# EAGLE board LiPoLoader_diet (EAGLE 5.09), part 1 of 2
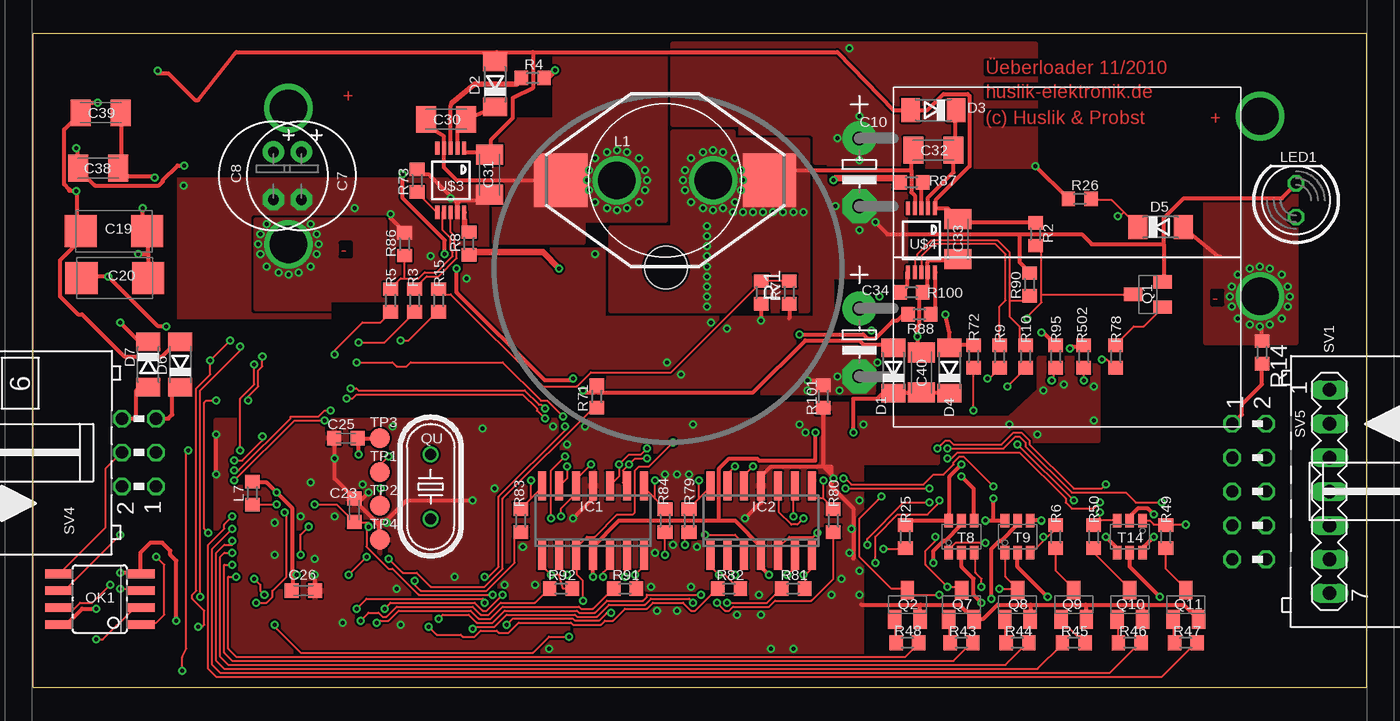
[diagram p0: board, top side]
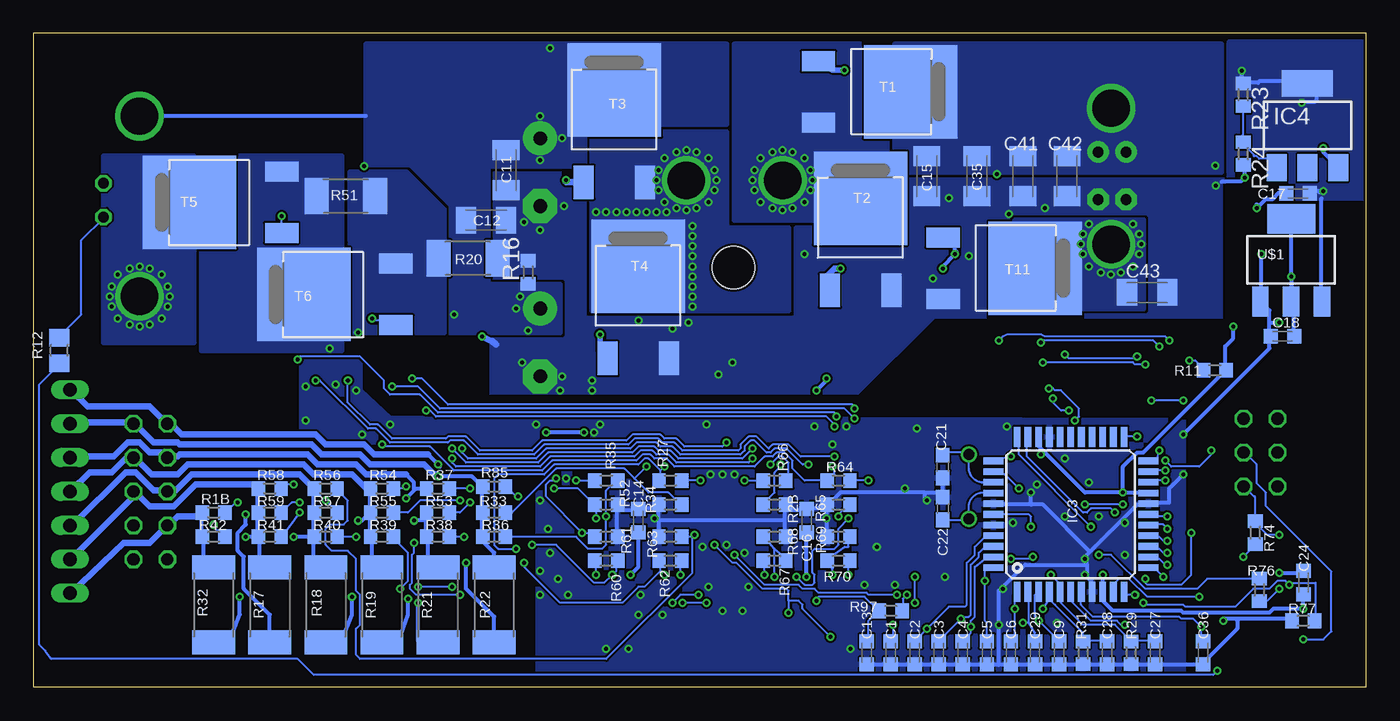
[diagram p1: board, bottom side, seen from below]

Size 99.8 x 49 mm. Coordinates in mm from the lower left corner, seen from the top.
Copper layers (1*16): Top 0.035mm / dielectric 1.5mm / Bottom 0.035mm
Design rules "Fischer-LP *": minimum track width 0.15mm, minimum drill 0.3mm, track to track 0.15mm, track to pad 0.15mm, pad to pad 0.15mm, via to via 0.15mm, smd to smd 0mil, copper to edge 0.2mm, drill to drill 0.3mm, minimum pad ring 0.2mm, minimum via ring 0.15mm, stop-mask expansion 0.1mm, vias tented up to drill 0.5mm, thermal gap 0.15mm
Net classes: 1 Hi-Power: width 0.3 mm; 2 Lo-Power: width 0.3 mm; 3 Iso-bus: clearance 0.6 mm to class 0, clearance 0.6 mm to class 1, clearance 0.6 mm to class 2
Holes 3.2 mm at 47.36,31.46
tRestrict: 16 lines
bRestrict: 9 lines
vRestrict: area 22.5,27.6 to 30.3,28.9

## Footprints (pad centres in the part's own frame; a part is rotated, then mirrored left to right if it is on the bottom)
SOLPAD3MM = drill 2.8 round: P$1 0,0
C0603K = smd 1.05 x 1.08: 1 -0.875,0; 2 0.875,0
E3,5-8 = drill 0.813 pad 1.6 round: + -1.778,0 | drill 0.813 pad 1.6 octagon: - 1.778,0
E5-13-L = drill 1.016 pad 2.54 round: + -2.54,0 | drill 1.016 pad 2.54 octagon: - 2.54,0
C1206K = smd 1.5 x 2: 1 -1.5,0; 2 1.5,0
SMC_C = smd 2.4 x 2.4: + -2.5,0; - 2.5,0
C0603 = smd 1.1 x 1: 1 -0.85,0; 2 0.85,0
SOD80C = smd 1.4 x 1.8: A 1.7,0; C -1.7,0
SO14 = smd 0.6 x 2.2: 1 -3.81,-2.6; 2 -2.54,-2.6; 3 -1.27,-2.6; 4 0,-2.6; 5 1.27,-2.6; 6 2.54,-2.6; 7 3.81,-2.6; 8 3.81,2.6; 9 2.54,2.6; 10 1.27,2.6; 11 0,2.6; 12 -1.27,2.6; 13 -2.54,2.6; 14 -3.81,2.6
TQFP44 = smd 1.5 x 0.5: 1 -5.8,4; 2 -5.8,3.2; 3 -5.8,2.4; 4 -5.8,1.6; 5 -5.8,0.8; 6 -5.8,0; 7 -5.8,-0.8; 8 -5.8,-1.6; 9 -5.8,-2.4; 10 -5.8,-3.2; 11 -5.8,-4; 23 5.8,-4; 24 5.8,-3.2; 25 5.8,-2.4; 26 5.8,-1.6; 27 5.8,-0.8; 28 5.8,0; 29 5.8,0.8; 30 5.8,1.6; 31 5.8,2.4; 32 5.8,3.2; 33 5.8,4 | smd 0.5 x 1.5: 12 -4,-5.8; 13 -3.2,-5.8; 14 -2.4,-5.8; 15 -1.6,-5.8; 16 -0.8,-5.8; 17 0,-5.8; 18 0.8,-5.8; 19 1.6,-5.8; 20 2.4,-5.8; 21 3.2,-5.8; 22 4,-5.8; 34 4,5.8; 35 3.2,5.8; 36 2.4,5.8; 37 1.6,5.8; 38 0.8,5.8; 39 0,5.8; 40 -0.8,5.8; 41 -1.6,5.8; 42 -2.4,5.8; 43 -3.2,5.8; 44 -4,5.8
SOT223 = smd 1.5 x 2: 1 -2.3,-3.15; 2 0,-3.15; 3 2.3,-3.15 | smd 3.8 x 2: 4 0,3.15
D333 = smd 4 x 4: 1 -7.82,0; 2 7.82,0
R0603 = smd 1 x 1.1: 1 -0.85,0; 2 0.85,0
LED5MM = drill 0.813 octagon: A -1.27,0; K 1.27,0
SOIC08 = smd 0.66 x 2.032: 1 -1.905,-3.073; 2 -0.635,-3.073; 3 0.635,-3.073; 4 1.905,-3.073; 5 1.905,3.073; 6 0.635,3.073; 7 -0.635,3.073; 8 -1.905,3.073
SOT23-BEC = smd 1 x 1.4: B -0.95,-1.1; C 0,1.1; E 0.95,-1.1
HC49U-V = drill 0.813 round: 1 -2.413,0; 2 2.413,0
R0805 = smd 1.3 x 1.5: 1 -0.95,0; 2 0.95,0
R2512 = smd 1.8 x 3.2: 1 -2.8,0; 2 2.8,0
R2010 = smd 1.8 x 2.7: 1 -2.2,0; 2 2.2,0
MA07-1 = drill 1.016 long: 1 -7.62,0; 2 -5.08,0; 3 -2.54,0; 4 0,0; 5 2.54,0; 6 5.08,0; 7 7.62,0
ML6L = drill 0.914 octagon: 1 -2.54,-1.27; 2 -2.54,1.27; 3 0,-1.27; 4 0,1.27; 5 2.54,-1.27; 6 2.54,1.27
ML10L = drill 0.914 octagon: 1 -5.08,-1.27; 2 -5.08,1.27; 3 -2.54,-1.27; 4 -2.54,1.27; 5 0,-1.27; 6 0,1.27; 7 2.54,-1.27; 8 2.54,1.27; 9 5.08,-1.27; 10 5.08,1.27
DPAK = smd 1.5 x 2.5: 1 -2.3,-6.9; 3 2.3,-6.9 | smd 7 x 7: 4 0,0
SUPERSOT-6 = smd 0.65 x 1: P$1 -0.95,-1.2; P$2 0,-1.2; P$3 0.95,-1.2; P$4 0.95,1.2; P$5 0,1.2; P$6 -0.95,1.2
TP15R = smd 1.5 x 1.5: TP 0,0
SOT223' = smd 1.219 x 2.235: LEFT -2.311,-3.099; MID 0,-3.099; RIGHT 2.311,-3.099 | smd 3.6 x 2.2: TAP 0,3.099
MSOP10W = smd 0.3 x 1: 1 -1,-2.4; 2 -0.5,-2.4; 3 0,-2.4; 4 0.5,-2.4; 5 1,-2.4; 6 1,2.4; 7 0.5,2.4; 8 0,2.4; 9 -0.5,2.4; 10 -1,2.4

## Placement (x,y rotation side)
BATT+  SOLPAD3MM  [SOLPAD3MM]  91.85,42.8 0 top
BATT-  SOLPAD3MM  [SOLPAD3MM]  91.85,29.3 0 top
C1  100n  [C0603K]  35.6,2.6 90 bottom
C2  100n  [C0603K]  33.8,2.6 90 bottom
C3  100n  [C0603K]  32,2.6 90 bottom
C4  100n  [C0603K]  30.2,2.6 90 bottom
C5  100n  [C0603K]  28.4,2.6 90 bottom
C6  100n  [C0603K]  26.6,2.6 90 bottom
C7  330µF / 25V  [E3,5-8]  20.06,38.34 270 top
C8  330µF / 25V  [E3,5-8]  17.97,38.34 270 top
C9  100n  [C0603K]  23,2.6 90 bottom
C10  1000µF/35V  [E5-13-L]  61.85,38.6 270 top
C11  1u  [C1206K]  64.4,38.75 90 bottom
C12  10µF  [C1206K]  65.9,35 0 bottom
C13  100n  [C0603K]  37.4,2.6 90 bottom
C14  100n  [C0603K]  54.5,12.5 270 bottom
C15  1u  [C1206K]  32.9,38.3 90 bottom
C16  100n  [C0603K]  41.9,12.5 270 bottom
C17  100n  [C0603K]  5.1,37 0 bottom
C18  100n  [C0603K]  6.25,26.3 0 bottom
C19  100u Tan  [SMC_C]  6.03,34.18 0 top
C20  100u Tan  [SMC_C]  6.1,30.67 0 top
C21  10p  [C0603]  31.7,16.55 90 bottom
C22  10p  [C0603]  31.7,13.4 270 bottom
C23  100n  [C0603K]  24.03,13.29 270 top
C24  100n  [C0603K]  4.68,7.86 270 bottom
C25  100n  [C0603K]  23.39,18.68 0 top
C26  100n  [C0603K]  20.22,7.26 180 top
C27  100n  [C0603K]  15.8,2.6 90 bottom
C28  100n  [C0603K]  19.4,2.6 90 bottom
C29  100n  [C0603K]  24.8,2.6 90 bottom
C30  1u  [C1206K]  30.91,42.56 0 top
C31  1u  [C1206K]  34.16,38.41 90 top
C32  1u  [C1206K]  67.4,40.25 0 top
C33  1u  [C1206K]  69.23,33.58 90 top
C34  1000µF/35V  [E5-13-L]  61.85,25.85 270 top
C35  10µF  [C1206K]  29.15,38.3 270 bottom
C36  100n  [C0603K]  12.2,2.6 90 bottom
C38  1u  [C1206K]  4.85,38.9 180 top
C39  1u  [C1206K]  5.05,43.05 180 top
C40  1u  [C1206K]  66.5,23.6 270 top
C41  10µF  [C1206K]  25.7,38.3 270 bottom
C42  10µF  [C1206K]  22.4,38.3 270 bottom
C43  10µF  [C1206K]  16.4,29.6 0 bottom
COIL1  SOLPAD3MM  [SOLPAD3MM]  43.7,38 0 top
COIL2  SOLPAD3MM  [SOLPAD3MM]  50.9,38 0 top
D1  LL43-GS08  [SOD80C]  64.4,23.75 90 top
D2  LL43-GS08  [SOD80C]  34.57,45.18 90 top
D3  LL43-GS08  [SOD80C]  67.4,43.25 180 top
D4  LL43-GS08  [SOD80C]  68.6,23.75 90 top
D5  15V BZT55C15  [SOD80C]  84.41,34.48 0 top
D6  LL43-GS08  [SOD80C]  11,24.2 90 top
D7  LL43-GS08  [SOD80C]  8.6,24.2 270 top
IC1  LM224D  [SO14]  41.9,12.5 0 top
IC2  LM224D  [SO14]  54.5,12.5 0 top
IC3  AVR_XMEGA_A4_44A  [TQFP44]  22.12,12.97 90 bottom
IC4  LM317MSTT3  [SOT223]  4.4,42.1 0 bottom
L1  COILCRAFT_D333  [D333]  47.3,38 0 top
L7  27nH  [R0603]  16.39,14.56 90 top
LED1  [LED5MM]  94.55,36.5 90 top
OK1  ILD217  [SOIC08]  4.98,6.62 90 top
Q1  BC817-25SMD  [SOT23-BEC]  83.45,29.45 90 top
Q2  BC817-25SMD  [SOT23-BEC]  65.45,6.2 0 top
Q7  BC817-25SMD  [SOT23-BEC]  69.5,6.2 0 top
Q8  BC817-25SMD  [SOT23-BEC]  73.7,6.2 0 top
Q9  BC817-25SMD  [SOT23-BEC]  77.9,6.2 0 top
Q10  BC817-25SMD  [SOT23-BEC]  82.1,6.2 0 top
Q11  BC817-25SMD  [SOT23-BEC]  86.3,6.2 0 top
QU  16MHz  [HC49U-V]  29.75,15.05 90 top
R1  2k2  [R0603]  56.6,29.6 90 top
R1B  43k - 0.1%  [R0603]  86.3,13.1 0 bottom
R2  10k  [R0603]  75.05,33.95 90 top
R2B  20k - 0.1%  [R0603]  44.3,13.7 180 bottom
R3  0R  [R0603]  28.55,29 90 top
R4  10  [R0603]  37.39,45.66 180 top
R5  0R  [R0603]  26.75,29 90 top
R6  10k  [R0603]  76.55,11.3 90 top
R7  NB12K00103JBB  [R0603]  54.5,29.6 90 top
R8  10  [R0603]  32.62,33.27 90 top
R9  0R  [R0603]  72.35,24.8 270 top
R10  0R  [R0603]  74.3,24.8 270 top
R11  2k2  [R0603]  11.33,23.77 0 bottom
R12  330  [R0805]  97.85,25.25 90 bottom
R14  2k2  [R0603]  92,25.1 270 top
R15  0R  [R0603]  30.35,29 270 top
R16  10k  [R0603]  62.75,31.1 90 bottom
R17  10  [R2512]  82.1,6.2 270 bottom
R18  10  [R2512]  77.9,6.2 270 bottom
R19  10  [R2512]  73.7,6.2 270 bottom
R20  0.005R  [R2010]  67.25,32.15 180 bottom
R21  10  [R2512]  69.5,6.2 270 bottom
R22  10  [R2512]  65.3,6.2 270 bottom
R23  470  [R0603]  9.2,44.4 270 bottom
R24  3300  [R0603]  9.2,40 270 bottom
R25  43k - 0.1%  [R0603]  65.3,11.3 270 top
R26  100k  [R0603]  78.36,36.6 0 top
R27  20k - 0.1%  [R0603]  52.1,15.5 180 bottom
R28  33k - 0.1%  [R0603]  1.17,52.98 0 top  (outside the outline)
R29  10k - 0.1%  [R0603]  17.6,2.6 270 bottom
R30  43k - 0.1%  [R0603]  1.17,56.15 180 top  (outside the outline)
R31  10k - 0.1%  [R0603]  21.2,2.6 270 bottom
R32  10  [R2512]  86.3,6.2 270 bottom
R33  43k - 0.1%  [R0603]  65.3,13.1 0 bottom
R34  20k - 0.1%  [R0603]  52.1,13.7 0 bottom
R35  20k - 0.1%  [R0603]  56.9,15.5 0 bottom
R36  43k - 0.1%  [R0603]  65.3,11.3 0 bottom
R37  43k - 0.1%  [R0603]  69.5,14.9 0 bottom
R38  10k  [R0603]  69.5,11.3 180 bottom
R39  10k  [R0603]  73.7,11.3 180 bottom
R40  10k  [R0603]  77.9,11.3 180 bottom
R41  10k  [R0603]  82.1,11.3 180 bottom
R42  10k  [R0603]  86.3,11.3 180 bottom
R43  4k7  [R0603]  69.5,3.35 180 top
R44  4k7  [R0603]  73.7,3.35 180 top
R45  4k7  [R0603]  77.9,3.35 0 top
R46  4k7  [R0603]  82.1,3.35 180 top
R47  4k7  [R0603]  86.3,3.35 180 top
R48  4k7  [R0603]  65.45,3.35 180 top
R49  10k  [R0603]  84.8,11.3 90 top
R50  10k  [R0603]  79.4,11.3 90 top
R51  0.1R  [R2010]  76.4,36.8 180 bottom
R52  20k - 0.1%  [R0603]  56.9,13.7 180 bottom
R53  43k - 0.1%  [R0603]  69.5,13.1 0 bottom
R54  43k - 0.1%  [R0603]  73.7,14.9 0 bottom
R55  43k - 0.1%  [R0603]  73.7,13.1 0 bottom
R56  43k - 0.1%  [R0603]  77.9,14.9 0 bottom
R57  43k - 0.1%  [R0603]  77.9,13.1 0 bottom
R58  43k - 0.1%  [R0603]  82.1,14.9 0 bottom
R59  43k - 0.1%  [R0603]  82.1,13.1 0 bottom
R60  20k - 0.1%  [R0603]  56.9,9.5 0 bottom
R61  20k - 0.1%  [R0603]  56.9,11.3 180 bottom
R62  20k - 0.1%  [R0603]  52.1,9.5 180 bottom
R63  20k - 0.1%  [R0603]  52.1,11.3 0 bottom
R64  20k - 0.1%  [R0603]  39.5,15.5 180 bottom
R65  20k - 0.1%  [R0603]  39.5,13.7 0 bottom
R66  20k - 0.1%  [R0603]  44.3,15.5 0 bottom
R67  10k - 0.1%  [R0603]  44.3,9.5 0 bottom
R68  2k - 0.1%  [R0603]  44.3,11.3 0 bottom
R69  2k - 0.1%  [R0603]  39.5,11.3 180 bottom
R70  36k - 0.1%  [R0603]  39.5,9.5 180 bottom
R71  120k - 0.1%  [R0603]  42.2,21.8 270 top
R72  120k - 0.1%  [R0603]  70.4,24.8 270 top
R73  10k  [R0603]  28.74,37.97 90 top
R74  820  [R0603]  8.3,11.6 270 bottom
R76  820  [R0603]  8,7.31 90 bottom
R77  10k  [R0603]  4.7,5 180 bottom
R78  4k7  [R0603]  81.05,24.8 90 top
R79  10k  [R0603]  49.1,12.5 90 top
R80  10k  [R0603]  59.9,12.5 90 top
R81  10k  [R0603]  56.9,7.4 0 top
R82  10k  [R0603]  52.1,7.4 0 top
R83  10k  [R0603]  36.5,12.5 90 top
R84  10k  [R0603]  47.3,12.5 90 top
R85  10k  [R0603]  65.3,15.05 180 bottom
R86  10k  [R0603]  27.8,33.2 90 top
R87  10  [R0603]  65.75,37.85 0 top
R88  10  [R0603]  66.35,27.95 0 top
R90  10k  [R0603]  74.6,30.2 90 top
R91  10k  [R0603]  44.3,7.4 0 top
R92  10k  [R0603]  39.5,7.4 0 top
R93  18k - 0.1%  [R0603]  1.39,58.53 0 top  (outside the outline)
R94  63k4 - 0.1%  [R0603]  0.76,61.2 0 top  (outside the outline)
R95  2k - 0.1%  [R0603]  76.55,24.8 90 top
R96  1k - 0.1%  [R0603]  5.2,61.76 0 top  (outside the outline)
R97  120k - 0.1%  [R0603]  35.6,5.75 180 bottom
R98  27k - 0.1%  [R0603]  6.47,58.79 0 top  (outside the outline)
R99  43k - 0.1%  [R0603]  5.83,55.9 0 top  (outside the outline)
R100  10k  [R0603]  65.75,29.6 0 top
R101  0R  [R0603]  59.15,21.8 90 top
R502  0R  [R0603]  78.65,24.8 270 top
SUPP+  SOLPAD3MM  [SOLPAD3MM]  19.1,43.4 0 top
SUPP-  SOLPAD3MM  [SOLPAD3MM]  19.1,33.2 0 top
SV1  spare  [MA07-1]  97.06,14.68 270 top
SV4  comm  [ML6L]  7.9,17.6 90 top
SV5  [ML10L]  91.04,14.68 270 top
T1  MOSFET-NIRLR8743  [DPAK]  34.11,44.62 270 bottom
T2  MOSFET-NIRLR8743  [DPAK]  37.85,36.65 0 bottom
T3  MOSFET-NIRLR8743  [DPAK]  56.3,44.75 0 bottom
T4  MOSFET-NIRLR8743  [DPAK]  54.5,31.55 0 bottom
T5  MOSFET-NIRLR8743  [DPAK]  88.1,36.35 90 bottom
T6  MOSFET-NIRLR8743  [DPAK]  79.55,29.45 90 bottom
T8  QS6J1=FDC6312P  [SUPERSOT-6]  69.5,11.3 0 top
T9  QS6J1=FDC6312P  [SUPERSOT-6]  73.7,11.3 0 top
T11  MOSFET-NIRLR8743  [DPAK]  24.78,31.41 270 bottom
T14  QS6J1=FDC6312P  [SUPERSOT-6]  82.1,11.3 180 top
TP1  TPTP15R  [TP15R]  25.93,16.14 0 top
TP2  TPTP15R  [TP15R]  25.93,13.61 0 top
TP3  TPTP15R  [TP15R]  25.93,18.68 0 top
TP4  TPTP15R  [TP15R]  25.93,11.06 0 top
U$1  LM1117  [SOT223']  5.62,32.02 0 bottom
U$2  [GEH_FISCHER_AKG55XX100_BODEN]  -0.1,-1 0 top
U$3  LM5106  [MSOP10W]  31.25,38 180 top
U$4  LM5106  [MSOP10W]  66.5,33.5 180 top

## Library data of the parts
BATT+ BATT- COIL1 COIL2 L1 SUPP+ SUPP- U$1 U$2 = Fabian
C1-C6 C9 C13 C14 C16-C18 C23-C29 C36 R1-R6 R8-R12 R14-R16 R23 R24 R26 R38-R50 R73 R74 R76-R88 R90-R92 R100 R101 R502 = rcl
C7 C8 = rcl; BEST: Farnell 1219469
C10 C34 = Fabian; BEST: Farnell 1219476; TYP: EEUFM1V102
C11 C15 C30-C33 C38-C40 = rcl; BEST: Farnell 1759446
C12 C35 C41-C43 = rcl; BEST: Farnell 1611967
C19 C20 = rcl; BEST: Farnell 1754066
C21 C22 = rcl; BEST: Farnell 1414600
D1-D4 D6 D7 = diode; BEST: Farnell 1779222 oder alt. 9804226
D5 = diode; BEST: Farnell 1621844
IC1 IC2 = linear; BEST: Farnell 1426352
IC3 = xmega; BEST: http://shop.embedit.de/product__809.php
IC4 = v-reg
L7 = rcl; BEST: Farnell 1457815
LED1 = led
OK1 = optocoupler; BEST: Farnell 1469512
Q1 Q2 Q7-Q11 = transistor-npn; BEST: Farnell 1081223
QU = crystal; BEST: Farnell 1469641
R1B R25 R30 R33 R36 R37 R53-R56 R58 R59 R99 = rcl; BEST: Farnell 1400610 od 1670198
R2B R27 R34 R35 R52 R60-R66 = rcl; BEST: Farnell 1653264
R7 = rcl; BEST: Farnell 9528075
R17-R19 R21 R22 R32 = rcl; BEST: Farnell 9235892 od 1100110
R20 = rcl; BEST: Farnell 1621986
R28 = rcl; BEST: Farnell 1653270
R29 R31 R67 = rcl; BEST: Farnell 1653253
R51 = rcl; BEST: Farnell 1100053
R57 R98 = rcl; BEST: Farnell 1692500
R68 R69 R95 = rcl; BEST: Farnell 1653263
R70 = rcl; BEST: Farnell 1400608
R71 R72 R97 = rcl; BEST: Farnell 1612041
R93 = rcl; BEST: Farnell 1160373 od 1400600
R94 = rcl; BEST: Farnell 1353179
R96 = rcl; BEST: Farnell 1653252
SV1 = con-lstb
SV4 = con-harting-ml; BEST: Farnell 1096979 Bu 1097021
SV5 = Fabian; BEST: Farnell 1099245 od 835993
T1-T6 T11 = Fabian; BEST: Farnell 1551908
T8 T9 T14 = Fabian; BEST: Farnell 1525470 od 1700713
TP1-TP4 = testpad
U$3 U$4 = Fabian; BEST: Farnell 1312793

## Nets
0V [Hi-Power]: C7.- C8.- C10.- C11.1 C12.2 C15.1 C31.1 C33.1 C34.- C35.2 C38.1 C39.1 C40.1 C41.2 C42.2 C43.2 LED1.K Q1.E R1.1 R7.1 R16.2 R20.1 R24.2 R73.2 R86.2 R90.2 R100.2 R101.2 T2.3 T4.3 T11.3 U$3.9 U$4.9
+3V3 [Lo-Power]: C18.2 C20.+ C24.2 C25.2 C26.2 IC3.9 IC3.19 IC3.31 L7.2 OK1.8 R11.2 TP3.TP U$1.MID U$1.TAP
+12V [Lo-Power]: C17.2 C19.+ C31.2 C33.2 C39.2 D2.A D3.A D6.A IC4.4 R2.2 R23.1 U$1.RIGHT U$3.1 U$4.1
+UB [Hi-Power]: BATT+.P$1 C10.+ C11.2 C12.1 C34.+ D4.A R16.1 R26.1 R72.1 T3.4
AVCC: C23.2 IC3.39 L7.1 R97.1
BALANCE1: IC3.12 R48.1
BALANCE2: IC3.13 R43.1
BALANCE3: IC3.14 R44.1
BALANCE4: IC3.15 R45.1
BALANCE5: IC3.16 R46.1
BALANCE6: IC3.17 R47.1
BATT- [Hi-Power]: BATT-.P$1 D5.A R14.1 T5.4
BATT-A [Hi-Power]: R51.2 R502.1 T5.3 T6.4
BATT-B [Hi-Power]: R20.2 R51.1 R95.2 T6.3
BUS_GND [Iso-bus]: SV4.2
BUS_RX [Iso-bus]: OK1.2 SV4.3
BUS_SUPP [Iso-bus]: OK1.6 R74.1 SV4.1
BUS_TX [Iso-bus]: OK1.5 SV4.4
CELL1 [Lo-Power]: R22.1 R33.1 R36.1 R85.2 SV1.2 SV5.2 T8.P$4
CELL2 [Lo-Power]: R21.1 R37.1 R38.2 R53.1 SV1.3 SV5.3 T9.P$6
CELL3 [Lo-Power]: R19.1 R39.2 R54.1 R55.1 SV1.4 SV5.4 T9.P$4
CELL4 [Lo-Power]: R18.1 R40.2 R56.1 R57.1 SV1.5 SV5.5 T14.P$4
CELL5 [Lo-Power]: R17.1 R41.2 R58.1 R59.1 SV1.6 SV5.6 T14.P$6
CELL6 [Lo-Power]: R1B.1 R32.1 R42.2 SV1.7 SV5.7
CELLGND [Lo-Power]: R14.2 R25.1 SV1.1 SV5.1 T8.P$6
CURR_SENS_SW: IC3.22 R78.1
GND [Lo-Power]: C1.1 C2.1 C3.1 C4.1 C5.1 C6.1 C9.1 C13.1 C14.1 C16.1 C17.1 C18.1 C19.- C20.- C21.1 C22.1 C23.1 C24.1 C25.1 C26.1 C27.1 C28.1 C29.1 C36.1 D7.C IC1.11 IC2.11 IC3.8 IC3.18 IC3.30 IC3.38 IC3.40 OK1.4 Q2.E Q7.E Q8.E Q9.E Q10.E Q11.E R2B.1 R29.2 R31.2 R34.1 R52.1 R61.1 R63.1 R65.1 R68.2 R69.2 R77.2 R101.1 TP4.TP U$1.LEFT
I_ACT_HI: C9.2 IC3.3 R92.1
I_ACT_LOW: C29.2 IC3.2 R91.1
I_RAW_HI_R: C13.2 IC1.3 R95.1 R97.2
I_RAW_LOW: IC1.5 R502.2
LED1: IC3.23 R12.1
N$1: IC1.10 R1B.2 R2B.2
N$2: IC1.12 R58.2 R65.2
N$3: IC1.9 R59.2 R66.2
N$4 [Lo-Power]: R8.1 T2.1
N$5 [Lo-Power]: R87.2 U$4.3
N$7: IC1.13 R57.2 R64.2
N$8: IC1.6 R67.2 R68.1
N$9: R100.1 U$4.6
N$10: OK1.3 R76.1
N$11: IC2.3 R56.2 R63.2
N$12: IC2.2 R55.2 R62.2
N$13 [Lo-Power]: R88.1 T4.1
N$15 [Lo-Power]: R4.2 U$3.3
N$16: IC2.5 R54.2 R61.2
N$17: IC2.6 R53.2 R60.2
N$18: IC2.12 R33.2 R34.2
N$19 [Lo-Power]: D7.A SV4.6
N$20: LED1.A R12.2
N$21: IC2.10 R37.2 R52.2
N$22: IC2.9 R35.2 R36.2
N$23: IC2.13 R25.2 R27.2
N$24 [Iso-bus]: OK1.1 R74.2
N$25 [Hi-Power]: C32.1 COIL2.P$1 L1.2 T3.3 T4.4 U$4.4
N$26 [Lo-Power]: R22.2 T8.P$5
N$27: IC4.1 R23.2 R24.1
N$28: IC1.2 R69.1 R70.2
N$30: IC1.8 R66.1 R84.2
N$31: C21.2 IC3.36 QU.2
N$32: C22.2 IC3.37 QU.1
N$35: Q1.B R78.2
N$36: IC1.7 R67.1 R91.2
N$37 [Hi-Power]: C30.1 COIL1.P$1 L1.1 T1.3 T2.4 U$3.4
N$40: D5.C R26.2 T5.1
N$41: Q8.C R39.1 T9.P$1
N$42: Q9.C R6.1
N$43: R5.2 R86.1 U$3.7
N$44: R9.1 U$4.8
N$48 [Lo-Power]: R21.2 T8.P$2
N$49 [Lo-Power]: R19.2 T9.P$5
N$50: IC1.14 R64.1 R83.2
N$51 [Lo-Power]: R18.2 T9.P$2
N$52 [Lo-Power]: R17.2 T14.P$2
N$53 [Lo-Power]: R32.2 T14.P$5
N$54: Q2.C R85.1 T8.P$1
N$55: Q7.B R43.2
N$56: Q8.B R44.2
N$57: Q9.B R45.2
N$58: Q10.B R46.2
N$59: Q11.B R47.2
N$60: IC2.1 R62.1 R82.2
N$62: R6.2 R40.1 T9.P$3
N$63: R41.1 R50.2 T14.P$3
N$64: R42.1 R49.2 T14.P$1
N$65: Q7.C R38.1 T8.P$3
N$66: IC2.7 R60.1 R81.2
N$67: Q11.C R49.1
N$68: Q10.C R50.1
N$69: IC2.8 R35.1 R80.2
N$70: IC2.14 R27.1 R79.2
N$71: R1.2 R7.2 R15.1
N$72 [Lo-Power]: R8.2 U$3.10
N$73 [Lo-Power]: R4.1 T1.1
N$74: R3.2 U$3.8
N$76: R73.1 U$3.6
N$77 [Lo-Power]: C30.2 D2.C U$3.2
N$78: IC1.1 R70.1 R92.2
N$79 [Lo-Power]: R88.2 U$4.10
N$80 [Lo-Power]: R87.1 T3.1
N$81: R10.1 R90.1 U$4.7
N$82: Q1.C R2.1 T6.1
N$83 [Lo-Power]: C32.2 D3.C U$4.2
N$84 [Lo-Power]: D6.C SV4.5
N$85: Q2.B R48.2
OPAMP_SUPP [Lo-Power]: C14.2 C16.2 C40.2 D1.C D4.C IC1.4 IC2.4
PDI_CLK: IC3.35 TP2.TP
PDI_DATA: IC3.34 TP1.TP
PWM1: IC3.10 R3.1
PWM1EN: IC3.11 R5.1
PWM2: IC3.20 R9.2
PWM2EN: IC3.21 R10.2
SERIAL_RX: IC3.32 OK1.7 R77.1
SERIAL_TX: IC3.33 R76.2
SUPP+ [Hi-Power]: C7.+ C8.+ C15.2 C35.1 C38.2 C41.1 C42.1 D1.A IC4.3 R71.1 SUPP+.P$1 T1.4 T11.1
SUPP-A [Hi-Power]: C43.1 SUPP-.P$1 T11.4
TEMP_MEAS2: C36.2 IC3.7 R11.1 R15.2
U_BATT_MEAS: C28.2 IC3.4 R31.1 R72.2
U_CELL_M1: C1.2 IC3.6 R79.1
U_CELL_M2: C2.2 IC3.41 R80.1
U_CELL_M3: C3.2 IC3.42 R81.1
U_CELL_M4: C4.2 IC3.43 R82.1
U_CELL_M5: C5.2 IC3.44 R83.1
U_CELL_M6: C6.2 IC3.1 R84.1
U_SUPP_MEAS: C27.2 IC3.5 R29.1 R71.2